# Altium PCB Copy of PCB1.PcbDoc
Units mm, origin at the board's own origin, x right, y up, seen from the top; angles counter-clockwise.
Board outline 38 x 20 mm, 2 copper layers (Top Layer, Bottom Layer); 28 components, 0 nets, 177 pads, 39 vias.
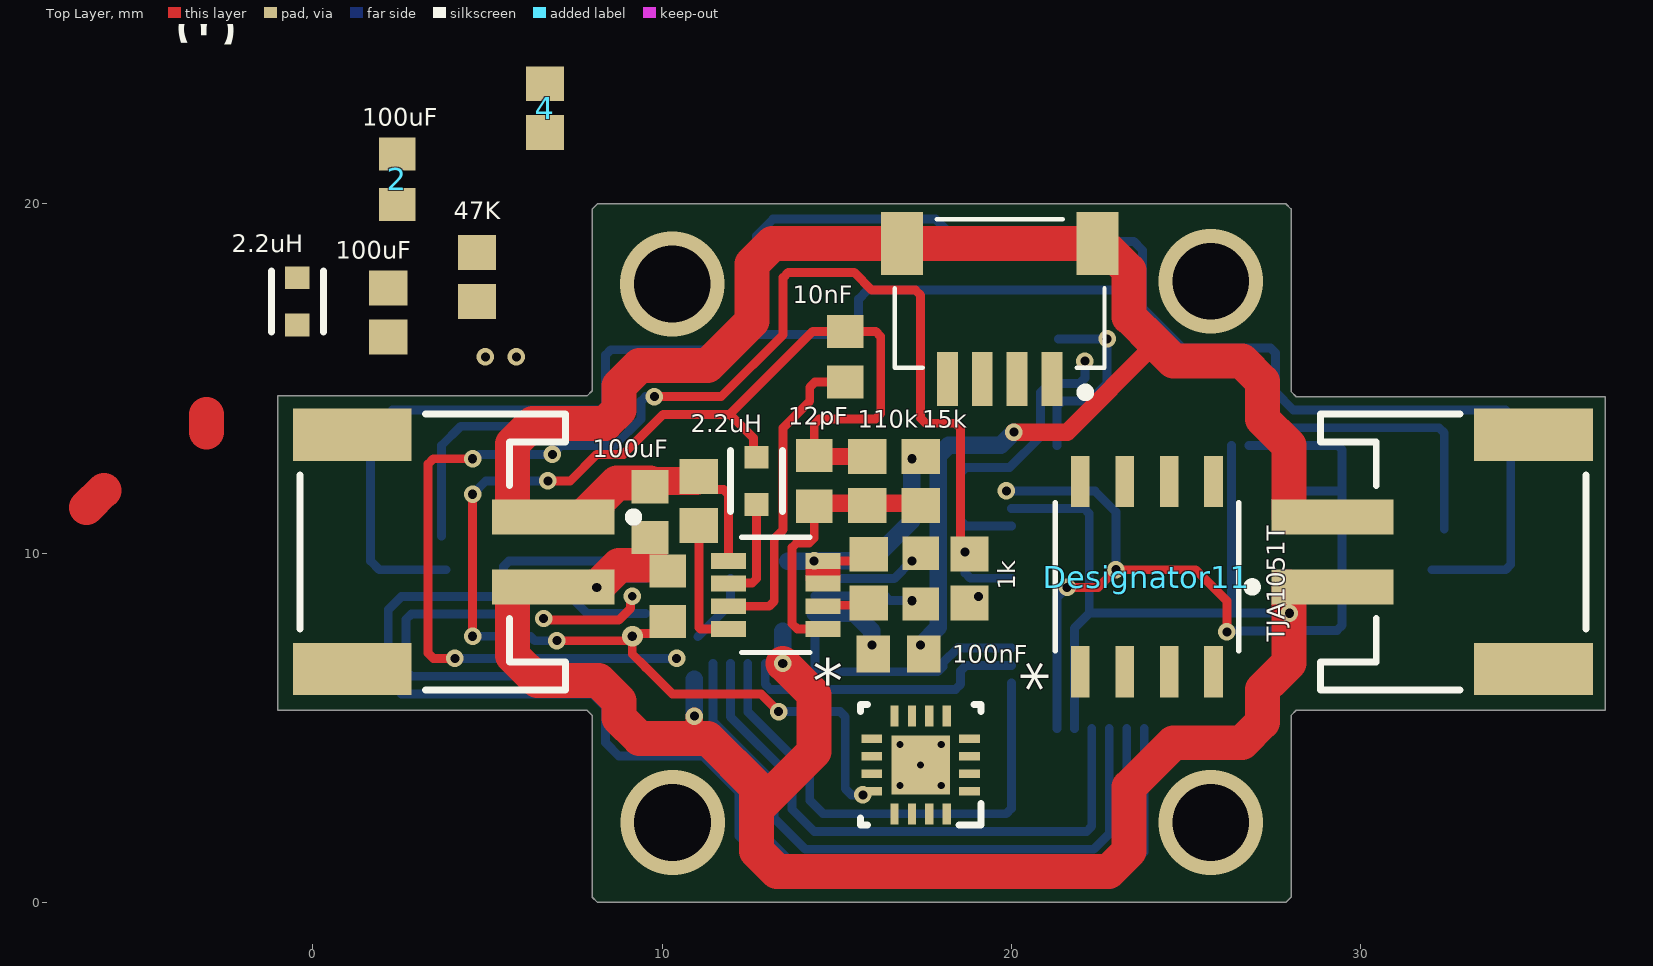
[diagram p0: Top Layer view]
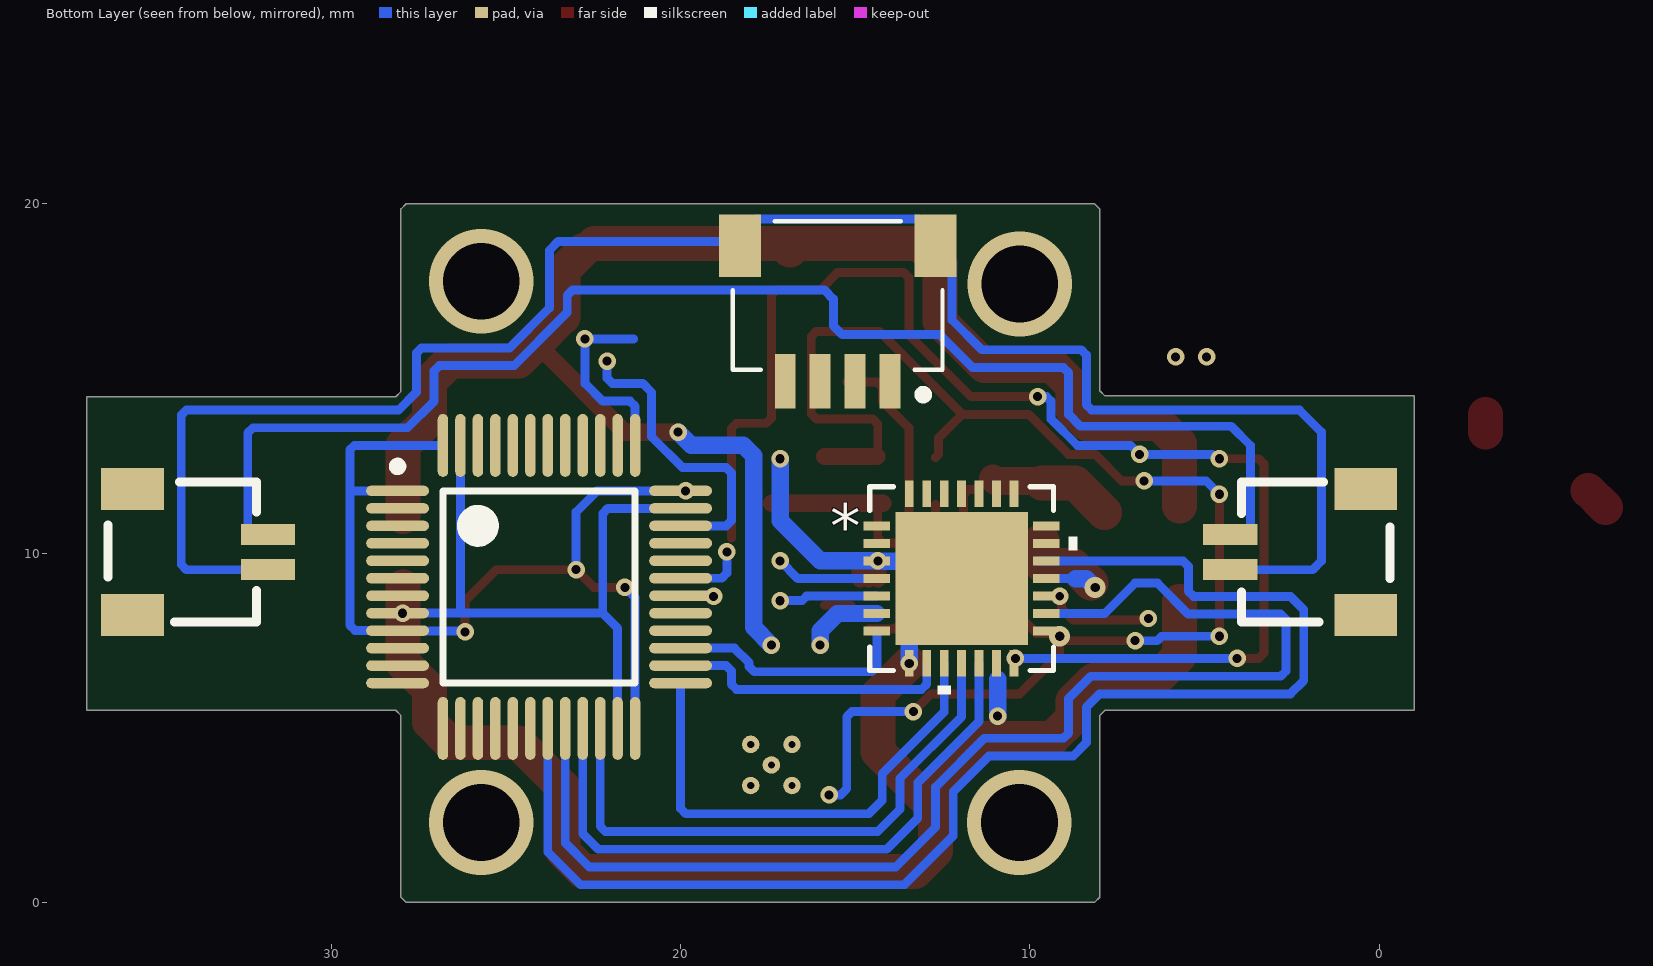
[diagram p1: Bottom Layer view, seen from below]

## Layer stack, top to bottom
Top Solder: solder mask 0.0102, Solder Resist, Dk 3.5
Top Layer: signal copper 0.0356
Dielectric 1: dielectric 0.32, FR-4, Dk 4.8
Bottom Layer: signal copper 0.0356
Bottom Solder: solder mask 0.0102, Solder Resist, Dk 3.5

## Board outline
8,0.149 8,5.351 7.851,5.5 -1,5.5 -1,14.5 7.851,14.5 8,14.649 8,19.851 8.149,20 27.851,20 28,19.851 28,14.627 28.149,14.478 37,14.478 37,5.5 28.149,5.5 28,5.351 28,0.149 27.851,0 8.149,0

## Design rules (kind name [scope] priority, off if disabled: settings)
Clearance [All] p1: gap=0.254 ignorepadtopadclearanceinfootprint=FALSE except(0: Arc-Hole Track-Hole SMDPad-Hole THPad-Hole Via-Hole Fill-Hole Poly-Hole Region-Hole Text-Hole)
PolygonConnect [All] p1: connectstyle=Relief reliefconductorwidth=0.254 reliefentries=4 polygonreliefangle="90 Angle" airgapwidth=0.254
RoutingVias [All] p1: holewidth=0.711 width=1.27 viastyle="Through Hole" minholewidth=0.1 minwidth=0.1 maxholewidth=5 maxwidth=5
SolderMaskExpansion [All] p1: expansion=0.102 istentingtop=FALSE
Width [All] p1: maxlimit=5 minlimit=0.254 preferedwidth=0.254
30 further rules are at their usual default settings.

## Components (designator, comment, footprint, x,y, rotation, side; value= is the part's Value field where it differs from the comment)
2 "100uF" CAPC1608X90X35ML10T15 2.413,20.701 r90 top
3 "2.2uH" FP-LQG18HH_00-MFG -0.439,17.204 r90 top
4 "47K" RESC1608X55X30ML20T20 6.646,22.735 r90 top
Designator11 "TJA1051T" SO8_SOT96-1_NXP 23.876,9.328 r90 top
? "100uF" RESC1608X55X30ML20T20 2.159,16.891 r90 top
? "100uF" CAPC1608X90X35ML10T15 10.16,8.763 r90 top
? "100uF" CAPC1608X90X35ML10T15 9.652,11.176 r90 top
? "47K" RESC1608X55X30ML20T20 11.049,11.495 r90 top
? "2.2uH" FP-LQG18HH_00-MFG 12.7,12.065 r90 top
? "15k" RESC1608X55X30ML20T20 17.399,12.065 r90 top
? "1k" RESC1608X55X30ML20T20 18.796,9.271 r90 top
? "47K" RESC1608X55X30ML20T20 15.91,9.266 r90 top
? "110k" RESC1608X55X30ML20T20 15.875,12.065 r90 top
? "47K" RESC1608X55X30ML20T20 4.699,17.907 r90 top
? "12pF" CAPC1608X90X35ML10T15 14.351,12.065 r90 top
? "10nF" CAPC1608X90X35ML10T15 15.24,15.621 r90 top
? "100nF" CAPC1608X90X35ML10T15 16.764,7.112 r0 top
? "22nF" CAPC1608X90X35ML10T15 17.399,9.271 r90 top
? "Comment" TSOT_303AIC_SGY 13.252,8.804 r180 top
? "Comment" SM02B-SRSS-TB(LF)(SN) 2.286,10.033 r90 bottom
? "Comment" "JST- S2B-PH-SM4-TB(LF)(SN)-2_V" 3.429,10.033 r270 top
? "Comment" JST_SM04B-SRSS-TB(LF)(SN) 15.5,14.921 r0 bottom
? "Comment" SM02B-SRSS-TB(LF)(SN) 33.782,10.033 r270 bottom
? "Comment" JST_SM04B-SRSS-TB(LF)(SN) 19.661,14.986 r180 top
? "Comment" "JST- S2B-PH-SM4-TB(LF)(SN)-2_V" 32.639,10.033 r90 top
? "Comment" LQFP48_N 24.047,9.031 r180 bottom
? "Comment" QFN28_5X5_3X8_EPAD_TRI 11.951,9.271 r180 bottom
? "Comment" RGT0016C 17.399,3.937 r180 top

## Footprints (in the part's own frame and the unit in brackets; to place one, negate y for a bottom-side part, rotate by r counter-clockwise, add the part's x,y. Pads: shape width x height; smd on the part's side, far side on the other; paste and mask are expansions set on the pad)
CAPC1608X90X35ML10T15 [mm] "Chip Capacitor, 2-Leads, Body 1.7x0.9mm, IPC Low Density"
  rect 0.95x1.05 smd: 1(-0.725,0) 2(0.725,0)
  body extent -0.85,-0.45 0.85,0.45, height 0.9
FP-LQG18HH_00-MFG [mm]
  rect 0.65x0.7 smd paste+0 mask+0: 1(-0.675,0) 2(0.675,0)
  silkscreen extent -0.87,-0.75 0.87,0.75, body extent -1.1,-0.58 1.1,0.58, height 0.25
"JST- S2B-PH-SM4-TB(LF)(SN)-2_V" [mm] "SMD, 2-Leads, Body 7.9x7.6mm, Pitch 2mm"
  rect 1x3.5 smd: 1(-1,3.45) 2(1,3.45)
  rect 1.5x3.4 smd: MP1(-3.35,-2.3) MP2(3.35,-2.3)
  silkscreen extent -3.95,-3.8 3.95,5.88, body extent -3.95,-3.8 3.95,4.8, height 5.6
JST_SM04B-SRSS-TB(LF)(SN) [mm]
  rect 0.6x1.55 smd: 1(-1.5,0) 2(-0.5,0) 3(0.5,0) 4(1.5,0)
  rect 1.2x1.8 smd: S1(-2.8,-3.875) S2(2.8,-3.875)
  silkscreen extent -3,-4.57 3,0.48
LQFP48_N [mm] "Thin QFP, 48-Leads, Body 7x7mm, Pitch 0.5mm, IPC Medium Density"
  oval 1.8x0.3 smd: 1(-4.05,2.75) 2(-4.05,2.25) 3(-4.05,1.75) 4(-4.05,1.25) 5(-4.05,0.75) 6(-4.05,0.25) 7(-4.05,-0.25) 8(-4.05,-0.75) 9(-4.05,-1.25) 10(-4.05,-1.75) 11(-4.05,-2.25) 12(-4.05,-2.75) 25(4.05,-2.75) 26(4.05,-2.25) 27(4.05,-1.75) 28(4.05,-1.25) 29(4.05,-0.75) 30(4.05,-0.25) 31(4.05,0.25) 32(4.05,0.75) 33(4.05,1.25) 34(4.05,1.75) 35(4.05,2.25) 36(4.05,2.75)
  oval 0.3x1.8 smd: 13(-2.75,-4.05) 14(-2.25,-4.05) 15(-1.75,-4.05) 16(-1.25,-4.05) 17(-0.75,-4.05) 18(-0.25,-4.05) 19(0.25,-4.05) 20(0.75,-4.05) 21(1.25,-4.05) 22(1.75,-4.05) 23(2.25,-4.05) 24(2.75,-4.05) 37(2.75,4.05) 38(2.25,4.05) 39(1.75,4.05) 40(1.25,4.05) 41(0.75,4.05) 42(0.25,4.05) 43(-0.25,4.05) 44(-0.75,4.05) 45(-1.25,4.05) 46(-1.75,4.05) 47(-2.25,4.05) 48(-2.75,4.05)
  silkscreen extent -4.18,-2.75 2.75,3.57, body extent -3.5,-3.5 3.5,3.5, height 1.6
QFN28_5X5_3X8_EPAD_TRI [mil]
  rect 30x10 smd paste+0 mask+0: 1(-95.5,59.06) 2(-95.5,39.37) 3(-95.5,19.68) 4(-95.5,0) 5(-95.5,-19.68) 6(-95.5,-39.37) 7(-95.5,-59.06) 15(95.5,-59.06) 16(95.5,-39.37) 17(95.5,-19.68) 18(95.5,0) 19(95.5,19.68) 20(95.5,39.37) 21(95.5,59.06)
  rect 10x30 smd paste+0 mask+0: 8(-59.06,-95.5) 9(-39.37,-95.5) 10(-19.68,-95.5) 11(0,-95.5) 12(19.68,-95.5) 13(39.37,-95.5) 14(59.06,-95.5) 22(59.06,95.5) 23(39.37,95.5) 24(19.68,95.5) 25(0,95.5) 26(-19.68,95.5) 27(-39.37,95.5) 28(-59.06,95.5)
  rect 149.61x149.61 smd paste+0 mask+0: 29(0,0)
  silkscreen extent -104,-130 130,104, body extent -99,-99 99,99, height 35
RESC1608X55X30ML20T20 [mm] "Chip Resistor, 2-Leads, Body 1.60x0.80mm, IPC Low Density"
  rect 1x1.1 smd: 1(-0.7,0) 2(0.7,0)
  body extent -0.9,-0.5 0.9,0.5, height 0.55
RGT0016C [mm]
  rect 0.6x0.24 smd paste+0 mask+0.051: 1(-1.4,0.75) 2(-1.4,0.25) 3(-1.4,-0.25) 4(-1.4,-0.75) 9(1.4,-0.75) 10(1.4,-0.25) 11(1.4,0.25) 12(1.4,0.75)
  rect 0.24x0.6 smd paste+0 mask+0.051: 5(-0.75,-1.4) 6(-0.25,-1.4) 7(0.25,-1.4) 8(0.75,-1.4) 13(0.75,1.4) 14(0.25,1.4) 15(-0.25,1.4) 16(-0.75,1.4)
  rect 1.68x1.68 smd paste-0.827 mask+0.051: 17(0,0)
  round 0.5 / inner round 1.524 / far side round 0.5 hole 0.203 paste-0.25 mask+0.051: V(-0.59,0.59) V(-0.59,-0.59) V(0,0) V(0.59,0.59) V(0.59,-0.59)
  silkscreen extent -1.72,-1.72 1.73,1.73
SM02B-SRSS-TB(LF)(SN) [mm]
  rect 0.6x1.55 smd: 1(-0.5,1.975) 2(0.5,1.975)
  rect 1.2x1.8 smd: 3(-1.8,-1.9) 4(1.8,-1.9)
  silkscreen extent -2,-2.6 2,1.65
SO8_SOT96-1_NXP [mil]
  rect 57.5x21 smd paste+0 mask+0: 1(-107.25,75) 2(-107.25,25) 3(-107.25,-25) 4(-107.25,-75) 5(107.25,-75) 6(107.25,-25) 7(107.25,25) 8(107.25,75)
  silkscreen extent -84,-104 84,104, body extent -122,-99 122,99, height 69
TSOT_303AIC_SGY [mil]
  rect 39.5x18 smd paste+0 mask+0: 1(-53.25,38.38) 2(-53.25,12.8) 3(-53.25,-12.8) 4(-53.25,-38.38) 5(53.25,-38.38) 6(53.25,-12.8) 7(53.25,12.8) 8(53.25,38.38)
  silkscreen extent -39,-65 39,65, body extent -59,-60 59,60, height 43

## Via types
v1: diameter 0.5, hole 0.26, Top Layer to Bottom Layer, 32 vias
v2: diameter 3, hole 2.2, Top Layer to Bottom Layer, 4 vias
v3: diameter 0.6, hole 0.26, Top Layer to Bottom Layer, 2 vias
v4: diameter 0.5, hole 0.25, Top Layer to Bottom Layer, 1 vias

## Nets (pads, with @x,y where several pads share a name; then routed paths per layer and width w, separated by ;. In a path a pad name is that pad's centre, name@x,y a point inside that pad or via, vN(x,y) a via of type N, cw(c..) or ccw(c..) an arc to the next point about the centre after c; other vN are vias at no path point)
pads on no net: 2.1 2.2 3.1 3.2 4.1 4.2 ?.1 ?.2 ?.3 ?.4 ?.5 ?.6 ?.7 ?.8 ?.9 ?.10 ?.11 ?.12 ?.13 ?.14 ?.15 ?.16 ?.17 ?.18 ?.19 ?.20 ?.21 ?.22 ?.23 ?.24 ?.25 ?.26 ?.27 ?.28 ?.29 ?.30 ?.31 ?.32 ?.33 ?.34 ?.35 ?.36 ?.37 ?.38 ?.39 ?.40 ?.41 ?.42 ?.43 ?.44 ?.45 ?.46 ?.47 ?.48 ?.MP1 ?.MP2 ?.S1 ?.S2 ?.V Designator11.1 Designator11.2 Designator11.3 Designator11.4 Designator11.5 Designator11.6 Designator11.7 Designator11.8
copper on no net: | length 521.6
  Top Layer w0.254: v1(4.064,6.985) 3.451,6.985 3.302,7.134 3.302,12.551 3.451,12.7 v1(4.572,12.7) ; v1(4.572,7.62) v1(4.572,11.684) ; v1(6.604,8.128) 6.649,8.083 7.879,8.083 8.752,8.083 9.097,8.428 9.097,8.716 v4(9.144,8.763) ; v1(6.731,12.065) 7.366,12.065 8.128,12.827 8.89,12.827 10.033,13.97 11.938,13.97 ; v1(6.985,7.493) 8.923,7.493 9.05,7.62 v3(9.144,7.62) ; v3@8.006,9.017 v3(8.128,9.017) ; v1(9.779,14.478) 11.684,14.478 13.462,16.256 13.462,17.885 13.611,18.034 15.494,18.034 16.002,17.526 17.25,17.526 17.399,17.377 17.399,13.865 17.548,13.716 18.393,13.716 18.542,13.567 18.542,10.433 ; 10.104,8.001 9.804,7.701 9.319,7.701 9.238,7.62 v3(9.144,7.62) ; 11.049,10.414 11.049,7.874 11.094,7.829 11.9,7.829 ; 11.469,11.938 11.469,11.825 11.472,11.822 11.751,11.822 11.9,11.673 11.9,9.779 ; 11.9,8.479 13.059,8.479 13.208,8.628 13.208,10.414 13.462,10.668 13.462,13.589 14.224,14.351 14.224,14.747 14.373,14.896 15.24,14.896 ; 12.065,9.144 12.573,9.144 12.7,9.271 12.7,11.39 ; 12.7,12.74 12.611,12.829 12.611,13.297 11.938,13.97 ; v1(13.335,5.461) 12.827,5.969 10.287,5.969 9.525,6.731 9.144,7.112 v3(9.144,7.62) ; 14.351,11.34 14.351,10.436 14.202,10.287 13.865,10.287 13.844,10.287 13.716,10.159 13.716,7.978 13.865,7.829 14.605,7.829 ; 14.351,12.79 14.351,13.694 14.5,13.843 15.494,13.843 16.107,13.843 16.256,13.992 16.256,16.197 16.107,16.346 15.24,16.346 14.986,16.346 14.314,16.346 11.938,13.97 ; 14.605,9.779 15.806,9.779 ; 15.113,8.509 15.875,8.509 ; v1(21.59,9.017) 22.423,9.017 22.479,9.017 v1(22.987,9.525) 25.273,9.525 26.162,8.636 v1(26.162,7.747)
  Top Layer w0.5: 10.922,5.08 v1(10.922,5.334) ; 14.209,11.425 15.838,11.425 17.384,11.425 ; 14.351,9.271 14.351,9.525 ; 14.375,12.765 15.875,12.765 ; 14.605,9.271 14.605,9.525 ; 14.859,9.271 14.859,9.525 ; v1(20.066,13.462) 21.59,13.462 24.13,16.002
  Top Layer w0.8: 9.552,12.03 9.588,12.066 10.986,12.066 11.049,12.13
  Top Layer w1: -6.477,11.303 -5.982,11.798 ; -3.048,13.462 -3.048,13.962 ; 5.715,8.61 5.715,7.063 6.428,6.35 8.177,6.35 8.763,5.764 8.763,5.285 9.349,4.699 11.303,4.699 12.7,3.302 12.7,2.667 ; 5.715,11.35 5.715,13.13 6.301,13.716 8.382,13.716 8.763,14.097 8.763,14.781 9.349,15.367 11.303,15.367 12.573,16.637 12.573,18.275 13.159,18.861 16.761,18.861 16.761,18.769 16.861,18.669 ; 7.863,11.165 8.701,12.003 9.652,12.003 ; v3@8.255,9.144 8.75,9.639 ; 8.763,9.652 9.652,9.652 ; 9.649,9.857 9.649,10.357 ; v1(13.451,6.845) 14.351,5.945 14.351,4.318 13.018,2.985 12.7,2.667 ; 16.861,18.861 22.461,18.861 ; 22.782,18.669 23.368,18.083 23.368,16.764 24.13,16.002 24.638,15.494 26.592,15.494 27.178,14.908 27.178,13.843 27.94,13.081 27.94,11.049 ; 27.94,9.033 27.94,6.858 27.567,6.485 27.178,6.096 27.178,5.158 26.592,4.572 24.638,4.572 23.368,3.302 23.368,1.475 22.782,0.889 13.286,0.889 12.7,1.475 12.7,2.667
  Bottom Layer w0.254: 3.683,10.489 3.683,13.081 4.235,13.633 8.553,13.633 8.89,13.97 8.89,15.162 9.039,15.311 11.628,15.311 12.573,16.256 15.367,16.256 15.621,16.51 15.621,17.272 15.875,17.526 19.304,17.526 23.092,17.526 23.241,17.377 23.241,16.891 23.368,16.764 24.765,15.367 25.296,15.367 26.902,15.367 27.051,15.218 27.051,14.351 27.813,13.589 32.236,13.589 32.385,13.44 32.385,10.683 ; 3.81,9.525 1.905,9.525 1.651,9.779 1.651,13.462 2.286,14.097 8.233,14.097 8.382,14.246 8.382,15.67 8.531,15.819 9.508,15.819 11.374,15.819 11.43,15.875 12.227,16.672 12.227,18.323 12.7,18.796 12.7,19.085 13.173,19.558 17.827,19.558 18.3,19.085 18.3,18.796 ; v1(4.064,6.985) v1(10.414,6.985) ; v1(4.572,7.62) 6.227,7.62 6.354,7.493 v1(6.985,7.493) ; v1(4.572,11.684) 4.953,12.065 v1(6.731,12.065) ; v1(4.572,12.7) 4.639,12.7 4.766,12.827 v1(6.858,12.827) 7.112,13.081 8.636,13.081 9.398,13.843 9.398,14.351 9.525,14.478 v1(9.779,14.478) ; 8.782,9.271 9.525,9.271 ; 9.525,8.271 7.858,8.271 6.985,9.144 6.35,9.144 5.461,8.255 2.816,8.255 2.667,8.106 2.667,6.626 2.816,6.477 8.255,6.477 8.89,5.842 8.89,4.848 9.039,4.699 11.303,4.699 12.7,3.302 12.7,2.159 13.843,1.016 14.684,1.016 22.606,1.016 23.297,1.707 23.297,4.981 ; 9.766,9.771 5.737,9.771 5.61,9.771 5.461,9.622 5.461,8.912 5.312,8.763 2.54,8.763 2.159,8.382 2.159,6.35 2.54,5.969 5.969,5.969 8.001,5.969 8.382,5.588 8.382,4.572 8.763,4.191 11.176,4.191 12.192,3.175 12.192,1.905 13.589,0.508 14.859,0.508 22.86,0.508 23.797,1.445 23.797,4.981 ; 11.019,7.607 11.951,8.539 11.951,9.271 ; 11.451,6.845 11.451,5.186 13.208,3.429 13.208,2.413 14.097,1.524 14.889,1.524 22.352,1.524 22.797,1.969 22.797,4.981 ; 11.951,6.845 11.951,5.321 13.716,3.556 13.716,2.667 14.351,2.032 15.621,2.032 22.148,2.032 22.297,2.181 22.297,4.981 ; 12.451,6.845 12.451,5.456 14.224,3.683 14.224,2.921 14.605,2.54 15.875,2.54 19.848,2.54 19.997,2.689 19.997,6.281 ; 12.951,6.845 12.951,6.245 13.099,6.096 18.393,6.096 18.542,6.245 18.542,6.632 18.691,6.781 19.997,6.781 ; v1(13.335,5.461) 15.091,5.461 15.24,5.312 15.24,3.647 15.24,3.257 15.418,3.08 v1(15.744,3.08) v1@15.716,3.109 ; 14.376,7.771 14.376,6.753 14.525,6.604 17.885,6.604 18.034,6.753 18.034,6.858 18.457,7.281 19.997,7.281 ; 14.376,8.771 16.387,8.771 16.514,8.644 17.137,8.644 v1(17.145,8.636) ; 14.376,9.271 16.488,9.271 16.637,9.271 v1(17.145,9.779) ; 18.3,18.923 20.193,18.923 23.495,18.923 23.749,18.669 23.749,17.018 24.892,15.875 27.41,15.875 27.559,15.726 27.559,14.605 28.067,14.097 34.141,14.097 34.29,13.948 34.29,9.674 34.141,9.525 32.04,9.525 ; v1(18.669,10.033) 18.669,9.43 18.818,9.281 19.997,9.281 ; v1(19.851,11.778) 22.385,11.778 22.985,11.178 22.985,9.527 v1(22.987,9.525) ; 19.997,10.781 18.691,10.781 18.542,10.93 18.542,12.297 18.691,12.446 19.939,12.446 20.828,13.335 20.828,14.605 21.082,14.859 21.661,14.859 21.949,14.859 22.098,15.008 v1(22.098,15.494) ; 19.997,11.281 22.076,11.281 22.225,11.132 22.225,8.275 21.797,7.847 21.797,4.981 ; 21.297,4.981 21.297,8.724 v1(21.59,9.017) ; 21.297,13.081 21.297,14.202 21.446,14.351 21.708,14.351 22.225,14.351 22.733,14.859 v1(22.733,16.129) 21.336,16.129 ; 22.225,8.281 26.297,8.281 ; v1(26.162,7.747) 26.187,7.772 28.088,7.772 28.097,7.781 28.106,7.79 29.315,7.79 29.464,7.939 29.464,11.632 29.464,12.954 29.337,13.081 26.797,13.081 ; 26.297,13.081 26.297,8.281 ; v1@27.921,8.272 v1@27.926,8.267 ; v1@27.935,8.272 v1@27.94,8.267 ; v1@28.097,8.281 27.935,8.281 26.297,8.281 ; 28.097,11.781 29.315,11.781
  Bottom Layer w0.5: v3(8.128,9.017) 8.382,9.271 8.682,9.271 ; v1(10.922,5.334) 10.922,6.392 ; v1(13.451,6.845) 13.451,7.758 ; 13.599,9.771 v1@14.376,9.771 ; v1(14.351,9.779) 16.002,9.779 17.145,10.922 v1(17.145,12.7) ; 14.376,8.271 15.507,8.271 16.002,7.776 v1(16.002,7.366) ; v1(17.399,7.366) 17.907,7.874 17.907,8.616 17.907,12.788 18.2,13.081 19.685,13.081 v1(20.066,13.462)
  other v1: 27.951,8.278 19.05,8.763 4.939,15.614 5.828,15.614
  other v2: 10.3,2.286 25.7,2.286 10.287,17.7 25.7,17.78

## Text inside footprints (layer, text, board x,y; h text height)
Designator11: Top Overlay "*" at 21.565,6.032 h1.27 r90; Top 3D Body "*" at 22.72,7.398 h1.27 r90
?: Top Overlay "*" at 15.176,7.499 h1.27 r180; Top 3D Body "*" at 14.04,8.626 h1.27 r180
?: Bottom Overlay "*" at 15.71,10.136 h1.27; Bottom 3D Body "*" at 13.678,10.136 h1.27